# Altium PCB Slave.PcbDoc
Units mil, origin at the board's own origin, x right, y up, seen from the top; angles counter-clockwise.
Board outline 6000 x 4000 mil, 2 copper layers (Top Layer, Bottom Layer); 18 components, 16 nets, 91 pads, 0 vias.
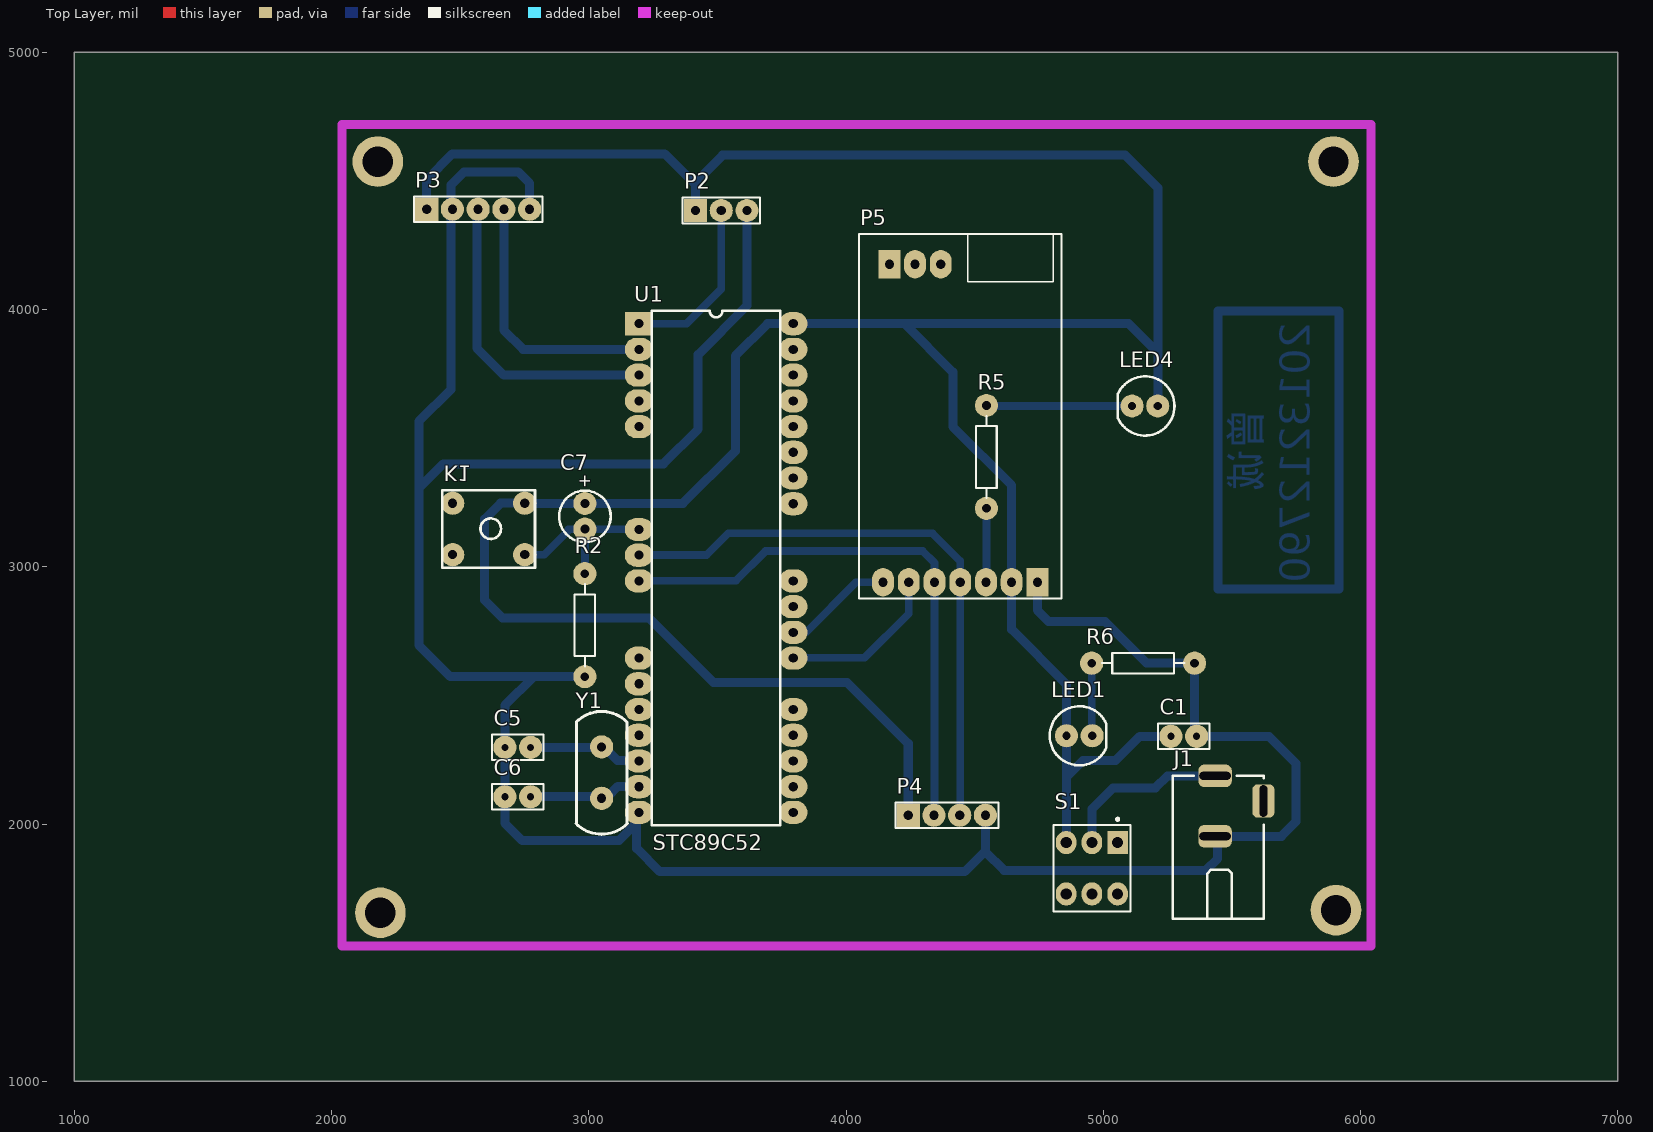
[diagram p0: Top Layer view]
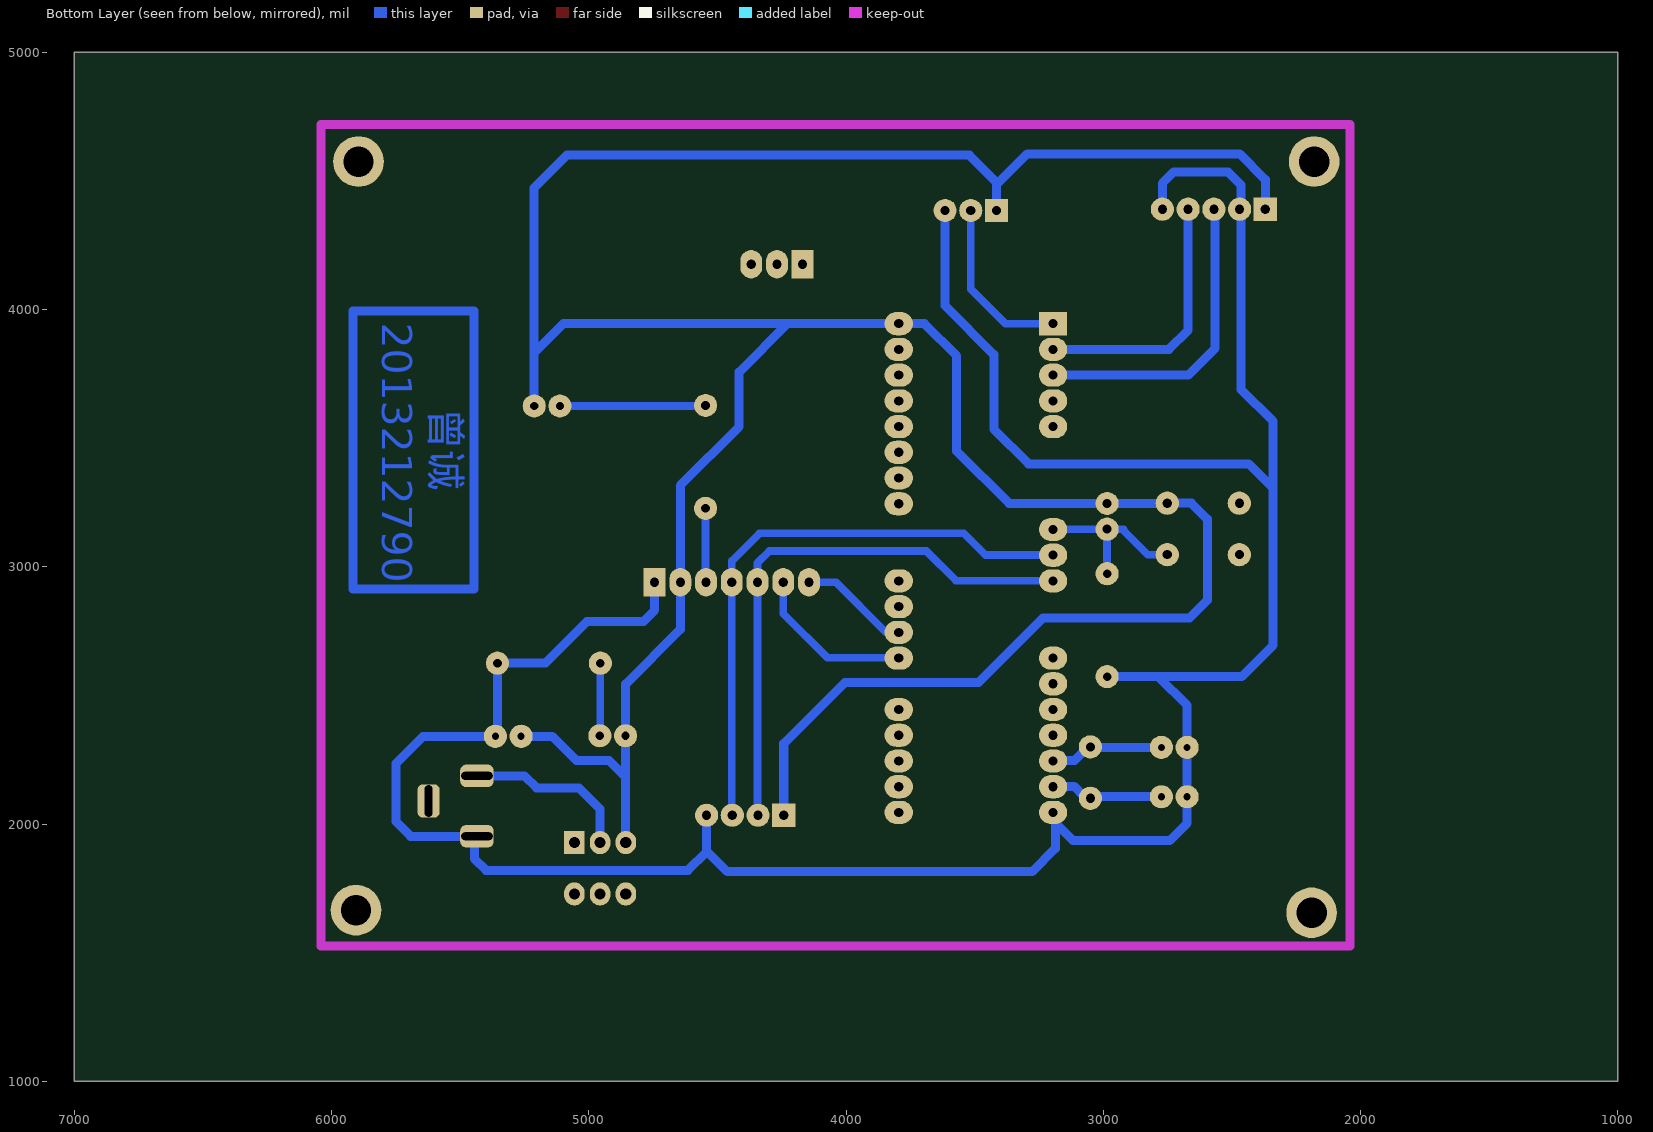
[diagram p1: Bottom Layer view, seen from below]

## Layer stack, top to bottom
Top Layer: signal copper 1.4
Dielectric: dielectric 12.6, FR-4, Dk 4.8
Bottom Layer: signal copper 1.4

## Board outline
1000,1000 7000,1000 7000,5000 1000,5000

## Design rules (kind name [scope] priority, off if disabled: settings)
Clearance [All] p1: gap=10
ComponentClearance [All] p1: gap=10 collisioncheckmode=3 verticalgap=0 showdistances=FALSE
PolygonConnect [All] p1: connectstyle=Relief reliefconductorwidth=10 reliefentries=4 polygonreliefangle="90 Angle" airgapwidth=10
RoutingVias [All] p1: holewidth=28 width=50 viastyle="Through Hole" minholewidth=28 minwidth=50 maxholewidth=28 maxwidth=50
SolderMaskExpansion [All] p1: expansion=4
Width [All] p1: maxlimit=40 minlimit=10 preferedwidth=30
27 further rules are at their usual default settings.

## Components (designator, comment, footprint, x,y, rotation, side; value= is the part's Value field where it differs from the comment)
C1 "Cap" RAD-0.1 5313,2341 r180 top
C5 "Cap" RAD-0.1 2724,2298 r0 top
C6 "Cap" RAD-0.1 2724,2106 r0 top
C7 "Cap Pol1" RB.1/.2 2985,3196 r90 top
J1 "DC-05" DC-05 5434.79,2187.37 r0 top (schematic designator J?)
K1 "四脚按键" 四脚按键 2751,3047 r90 top locked
LED1 "LED" LED 4857,2343 r0 top
LED4 "LED" LED 5212,3625 r180 top
P2 "DHT11" HDR1X3 3415,4385 r0 top
P3 "BH1750" HDR1X5 2370,4390 r0 top
P4 "下载口" HDR1X4 4242,2034 r0 top
P5 "无线串口模块" AS32-TTL-100 4744,2940 r90 top
R2 "Res2" AXIAL-0.4#1 2985,2773 r270 top
R5 "Res2" AXIAL-0.4#2 4546,3427 r270 top
R6 "Res2" AXIAL-0.4#2 5155,2625 r0 top
S1 "SW-DPDT" SWITCH_B1 4956,1828 r270 top
U1 "STC89C51" DIP-40 3195,3945 r0 top
Y1 "XTAL" XTAL 3050,2200 r90 top (schematic designator 2)

## Footprints (in the part's own frame and the unit in brackets; to place one, negate y for a bottom-side part, rotate by r counter-clockwise, add the part's x,y. Pads: shape width x height; smd on the part's side, far side on the other; paste and mask are expansions set on the pad)
AS32-TTL-100 [mil]
  rect 110x85 hole 35.43 mask+1.97: 1(0,0) 1(1236.22,575.59)
  oval 110x85 hole 35.43 mask+1.97: 2(0,100) 2(1236.22,475.59) 3(0,200) 3(1236.22,375.59) 4(0,300) 5(0,400) 6(0,500) 7(0,600)
  silkscreen extent -63,-94 1355,694
AXIAL-0.4#1 [mil] "Axial Device, Thru-Hole; 2 Leads; 0.4 in Pin Spacing"
  round 90 hole 33.47: 1(-200,0)
  round 90 hole 33.46: 2(200,0)
  silkscreen extent -160,-40 160,40
AXIAL-0.4#2 [mil] "Axial Device, Thru-Hole; 2 Leads; 0.4 in Pin Spacing"
  round 90 hole 33.46: 1(-200,0) 2(200,0)
  silkscreen extent -160,-40 160,40
DC-05 [mil]
  rrect50% 129.92x86.61 hole 30 slot 122.05 at 0 deg: 1(0,0) 2(0,-235)
  rrect50% 86.61x129.92 hole 30 slot 122.05 at 90 deg: 3(188,-98)
  silkscreen extent -165,-555 190,0
DIP-40 [mil]
  rect 110x90 hole 35.43: 1(0,0)
  oval 110x90 hole 35.43: 2(0,-100) 3(0,-200) 4(0,-300) 5(0,-400) 9(0,-800) 10(0,-900) 11(0,-1000) 14(0,-1300) 15(0,-1400) 16(0,-1500) 17(0,-1600) 18(0,-1700) 19(0,-1800) 20(0,-1900) 21(600,-1900) 22(600,-1800) 23(600,-1700) 24(600,-1600) 25(600,-1500) 27(600,-1300) 28(600,-1200) 29(600,-1100) 30(600,-1000) 33(600,-700) 34(600,-600) 35(600,-500) 36(600,-400) 37(600,-300) 38(600,-200) 39(600,-100) 40(600,0)
  silkscreen extent 50,-1950 550,50
HDR1X3 [mil] "Connector; Header; 3 Position"
  rect 90x90 hole 35.43: 1(0,0)
  round 90 hole 35.43: 2(100,0) 3(200,0)
  silkscreen extent -50,-50 250,50
HDR1X4 [mil] "Connector; Header; 4 Position"
  rect 90x90 hole 35.43: 1(0,0)
  round 90 hole 35.43: 2(100,0) 3(200,0) 4(300,0)
  silkscreen extent -50,-50 350,50
HDR1X5 [mil] "Connector; Header; 5 Position"
  rect 90x90 hole 35.43: 1(0,0)
  round 90 hole 35.43: 2(100,0) 3(200,0) 4(300,0) 5(400,0)
  silkscreen extent -50,-50 450,50
LED [mil]
  round 90 hole 32: 1(0,0) 2(100,0)
  silkscreen extent -65,-115 155,115
RAD-0.1 [mil] "Radial Cap, Thru-Hole; 2 Leads; 0.1 in Pin Spacing"
  round 90 hole 27.56: 1(-50,0) 2(50,0)
  silkscreen extent -100,-50 100,50
RB.1/.2 [mil]
  round 90 hole 35: 1(50,0) 2(-50,0)
  silkscreen extent -100,-100 100,100
SWITCH_B1 [mil] "单刀"
  rect 90x80 hole 43.31: 1(-100,100)
  oval 90x80 hole 43.31: 2(-100,0) 3(-100,-100) 4(100,-100) 5(100,0) 6(100,100)
  silkscreen extent -195,-150 169,150
XTAL [mil]
  round 90 hole 35.43: 1(-100,0) 2(100,0)
  silkscreen extent -240,-100 238,100
四脚按键 [mil]
  round 90 hole 35.43: 1(0,0) 2(200,0) 3(0,280) 4(200,280)
  silkscreen extent -50,-40 250,320

## Part data
C1 C5 C6: "Capacitor"
C7: "Polarized Capacitor (Radial)"
P2: library part "Header 3", "Header, 3-Pin"
P3: library part "Header 5", "Header, 5-Pin"
P4: library part "Header 4", "Header, 4-Pin"
P5: library part "Header 7", "Header, 7-Pin"
R2 R5 R6: "Resistor"
S1: "单刀双掷开关"
Y1: "Crystal Oscillator"

## Free pads (board coordinates)
  round 196.85 hole 118.11: 1(2190,1655) 2(5905,1665) 3(5895,4575) 4(2180,4575)

## Nets (pads, with @x,y where several pads share a name; then routed paths per layer and width w, separated by ;. In a path a pad name is that pad's centre, name@x,y a point inside that pad or via, vN(x,y) a via of type N, cw(c..) or ccw(c..) an arc to the next point about the centre after c; other vN are vias at no path point)
5V: J1.1 S1.2 | length 662.4
  Bottom Layer w35: S1.2 4956,2058 5038,2140 5203,2140 5250.37,2187.37 J1.1
AUX: P5.3@4544,2940 R5.2 | length 287.8
  Bottom Layer w30: P5.3@4544,2940 4546,2942 R5.2
DATA: P2.2 U1.1 | length 680.9
  Bottom Layer w30: U1.1 3380,3945 3515,4080 P2.2
GND: C1.1 C5.1 C6.1 J1.2 P2.3 P3.2 P3.5 P4.4 P5.1@4744,2940 R2.2 R6.2 U1.20 | length 11120.7
  Bottom Layer w35: P3.5 P3.5@2770,4395 ; P3.5@2785,4380 P3.5@2770,4395 ; R2.2 2786,2573 ; U1.20@3186,2004 3117,1935 2742,1935 2674,2003 C6.1 C5.1 2674,2461 2786,2573 ; U1.20@3186,2046 3186,1905 3276,1815 4461,1815 4540.5,1894.5 ; P2.3 3615,4015 3425,3825 3425,3535 3290,3400 2435,3400 2340,3305 ; P4.4 4542,1893 4615,1820 5399,1820 5444.63,1865.63 J1.2@5444.63,1943.28 ; P5.1@4744,2940 4744,2831 4787,2788 5006,2788 5169,2625 R6.2 5355,2349 C1.1 5644,2341 5750,2235 5750,2010 5692.37,1952.37 J1.2 ; 2340,3305 2340,3565 2465,3690 2465,4485 2515,4535 2725,4535 2770,4490 P3.5@2770,4395 ; 2340,3305 2340,2695 2462,2573 2786,2573
M0: P5.7 U1.28 | length 438.4
  Bottom Layer w30: U1.28@3786,2746 3845,2746 4039,2940 P5.7
M1: P5.6 U1.27 | length 651.2
  Bottom Layer w30: U1.27@3786,2646 4072,2646 4244,2818 P5.6
NetLED1_2: LED1.2 R6.1 | length 282.8
  Bottom Layer w30: R6.1 4955,2345 LED1.2
NetLED4_2: LED4.2 R5.1 | length 566.8
  Bottom Layer w30: R5.1 4548,3625 LED4.2
RESET: C7.2 K1.1 R2.1 U1.9 | length 714
  Bottom Layer w30: K1.1 2827,3047 2926,3146 C7.2 R2.1 ; 2920,3146 U1.9@3186,3146
RX: P4.3 P5.4 U1.10 | length 2323.5
  Bottom Layer w30: U1.10@3186,3046 3458,3046 3542,3130 4336,3130 4444,3022 P5.4 P4.3@4444,2036
SCL: P3.3 U1.3 | length 1193.5
  Bottom Layer w35: P3.3@2565,4370 2565,3850 2670,3745 U1.3
SDA: P3.4 U1.2 | length 1026.1
  Bottom Layer w35: P3.4 2670,3920 2745,3845 U1.2
TX: P4.2 P5.5 U1.11 | length 2215
  Bottom Layer w30: U1.11@3192,2952 3186,2946 3572,2946 3687,3061 4298,3061 4344,3015 P5.5 4344,2036 P4.2
VCC: C1.2 C7.1 K1.2 LED1.1 LED4.1 P2.1 P3.1 P4.1 P5.2@4644,2940 S1.3 U1.40 | length 12550.6
  Bottom Layer w35: P3.1@2370,4370 2370,4505 2470,4605 3295,4605 3415,4485 ; P2.1 3415,4485 ; U1.40@3786,3946 4226,3946 ; U1.40 3695,3945 3570,3820 3570,3450 3366,3246 C7.1 2752,3246 K1.2 2657,3247 2595,3185 2595,2870 2665,2800 3235,2800 3485,2550 4004,2550 4242,2312 P4.1 ; S1.3 4857,1929 4857,2182 ; LED4.1 5212,3832 ; C1.2 5142,2341 5048,2247 4922,2247 4857,2182 ; 3415,4485 3415,4495 3520,4600 5085,4600 5212,4473 5212,3832 ; 4226,3946 5098,3946 5212,3832 ; 4226,3946 4415,3757 4415,3545 4644,3316 4644,2940 4644,2757 4857,2544 LED1.1 4857,2182
XTAL1: C6.2 U1.19 Y1.1 | length 428.6
  Bottom Layer w30: Y1.1@3016,2106 Y1.1@3073,2106
  Bottom Layer w35: C6.2 Y1.1@3016,2106 ; Y1.1@3073,2106 3113,2146 U1.19@3186,2146
XTAL2: C5.2 U1.18 Y1.2 | length 433.6
  Bottom Layer w20: C5.2 C5.2@2774.13,2298.13
  Bottom Layer w30: Y1.2@3016,2298.13 Y1.2@3059.87,2298.13
  Bottom Layer w35: C5.2@2774.13,2298.13 Y1.2@3016,2298.13 ; Y1.2@3059.87,2298.13 3112,2246 U1.18@3186,2246
pads on no net: J1.3 K1.3 K1.4 P5.1@4168.41,4176.22 P5.2@4268.41,4176.22 P5.3@4368.41,4176.22 S1.1 S1.4 S1.5 S1.6 U1.4 U1.5 U1.14 U1.15 U1.16 U1.17 U1.21 U1.22 U1.23 U1.24 U1.25 U1.29 U1.30 U1.33 U1.34 U1.35 U1.36 U1.37 U1.38 U1.39
copper on no net: | length 3135
  Bottom Layer w35: 5502,3994 5917,3994 5917,2954 5917,2914 ; 5517,3994 5447,3994 5447,2914 5917,2914 ; 5897,2914 5917,2914

## Keep-outs
Keep-Out Layer:
  lines w35: 2040,1525 2040,4719 6040,4719 6040,1525 2040,1525

## Other copper
Bottom Layer:
  text "2013212790" at 5842,3949 h200 r90
  text "曾诚" at 5650,3615 h200 r90

## Silkscreen, mask and mechanical layers (free items; w line width, h text height)
Top Overlay:
  text "STC89C52" at 3248,1898 h60

## Dimensions
2040,4719 to 2040,1525 on Top Overlay
2040,1525 to 6040,1525 on Top Overlay

## Text inside footprints (layer, text, board x,y; h text height)
C7: Top Overlay "+" at 3005,3306 h48 r90